# Altium PCB LDO_PCB.PcbDoc
Units mm, origin at the board's own origin, x right, y up, seen from the top; angles counter-clockwise.
Board outline 27 x 11.5 mm, 2 copper layers (Top Layer, Bottom Layer); 5 components, 3 nets, 17 pads, 4 vias.
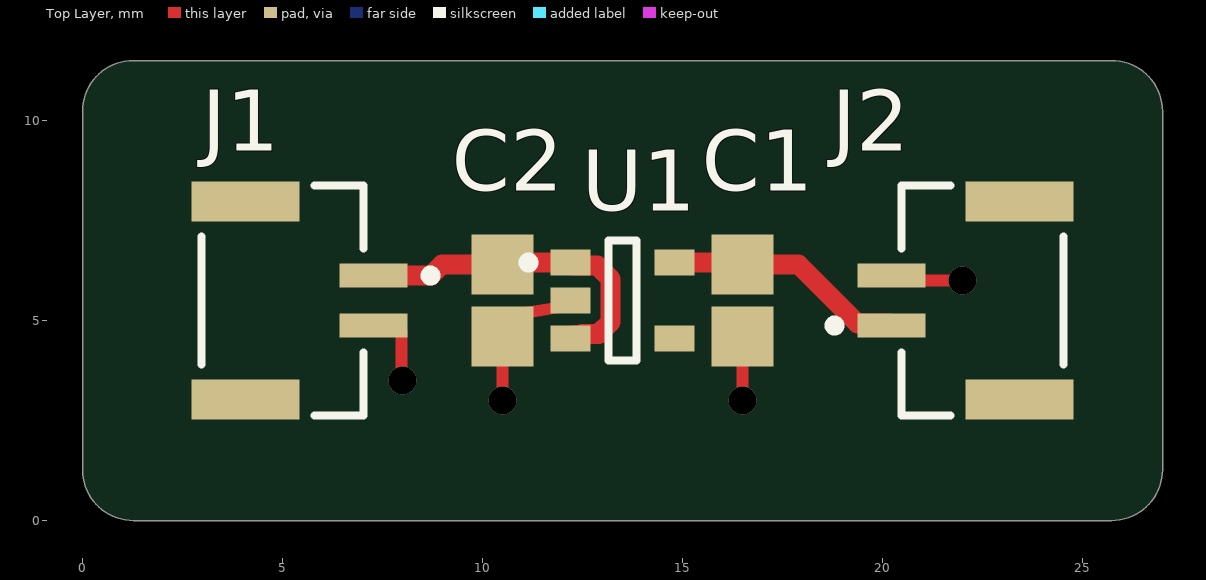
[diagram p0: Top Layer view]
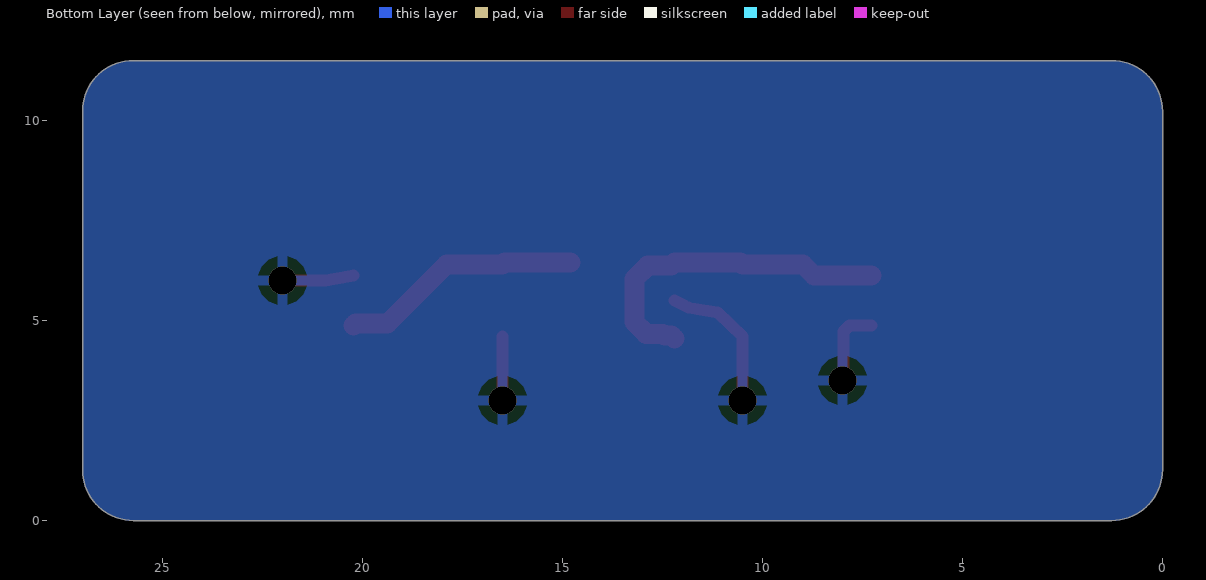
[diagram p1: Bottom Layer view, seen from below]
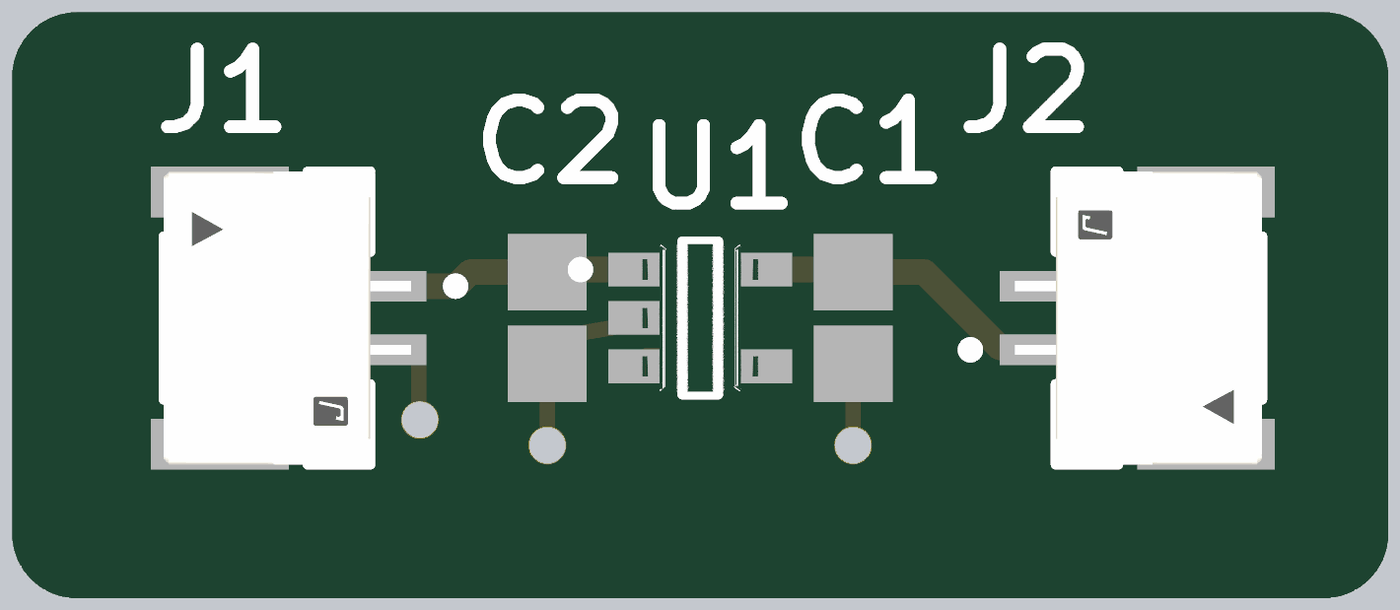
[diagram p2: 3D render of the assembled board from above, using the file's embedded part models]

## Layer stack, top to bottom
Top Solder: solder mask 0.0102, Solder Resist, Dk 3.5
Top Layer: signal copper 0.0356
Dielectric 1: dielectric 0.32, FR-4, Dk 4.8
Bottom Layer: signal copper 0.0356
Bottom Solder: solder mask 0.0102, Solder Resist, Dk 3.5

## Board outline
0,1.27 ccw(c1.27,1.27) 1.27,0 25.73,0 ccw(c25.73,1.27) 27,1.27 27,10.23 ccw(c25.73,10.23) 25.73,11.5 1.27,11.5 ccw(c1.27,10.23) 0,10.23

## Design rules (kind name [scope] priority, off if disabled: settings)
Clearance [All] p1: gap=0.254 ignorepadtopadclearanceinfootprint=FALSE
PolygonConnect [All] p1: connectstyle=Relief reliefconductorwidth=0.254 reliefentries=4 polygonreliefangle="90 Angle" airgapwidth=0.254
RoutingVias [All] p1: holewidth=0.711 width=1.27 viastyle="Through Hole" minholewidth=0.711 minwidth=1.27 maxholewidth=0.711 maxwidth=1.27
SolderMaskExpansion [All] p1: expansion=0 istentingtop=FALSE
SupplyNets "Schematic Supply Nets_2" [InNet('+3V3')] p1: voltage=0.000
SupplyNets "Schematic Supply Nets_1" [InNet('+5V')] p2: voltage=0.000
SupplyNets "Schematic Supply Nets" [InNet('GND')] p3: voltage=0.000
Width [All] p1: maxlimit=0.5 minlimit=0.254 preferedwidth=0.3
30 further rules are at their usual default settings.

## Components (designator, comment, footprint, x,y, rotation, side; value= is the part's Value field where it differs from the comment)
C1 "1 uF" CAPC2013X145X50ML20T25 16.5,5.5 r90 top
C2 "1 uF" CAPC2013X145X50ML20T25 10.5,5.5 r90 top
J1 "SM02B-GHS-TB(LF)(SN)" FP-SM02B-GHS-TB_LF_SN-MFG 5,5.5 r270 top
J2 "SM02B-GHS-TB(LF)(SN)" FP-SM02B-GHS-TB_LF_SN-MFG 22.5,5.5 r90 top
U1 "MIC5317-1.8YM5-TR" FP-SOT23-5LD-PL-1-MFG 13.5,5.5 r0 top

## Footprints (in the part's own frame and the unit in brackets; to place one, negate y for a bottom-side part, rotate by r counter-clockwise, add the part's x,y. Pads: shape width x height; smd on the part's side, far side on the other; paste and mask are expansions set on the pad)
CAPC2013X145X50ML20T25 [mm] "Chip Capacitor, 2-Leads, Body 2.00x1.25mm, IPC Low Density"
  rect 1.5x1.55 smd: 1(-0.9,0) 2(0.9,0)
  body extent -1.1,-0.72 1.1,0.72, height 1.45
FP-SM02B-GHS-TB_LF_SN-MFG [mm]
  rect 0.6x1.7 smd paste+0 mask+0: 1(-0.625,2.275) 2(0.625,2.275)
  rect 1x2.7 smd paste+0 mask+0: 3(-2.475,-0.925) 4(2.475,-0.925)
  silkscreen extent -2.88,-2.02 2.88,3.83, body extent -3.08,-2.37 3.08,3.22, height 0.25
FP-SOT23-5LD-PL-1-MFG [mm]
  rect 1x0.66 smd paste+0 mask+0: 1(-1.3,0.95) 2(-1.3,0) 3(-1.3,-0.95) 4(1.3,-0.95) 5(1.3,0.95)
  silkscreen extent -2.47,-1.5 0.35,1.5, body extent -1.9,-1.6 1.9,1.6, height 0.25

## Part data
C1 C2: library part CMP-2007-01253-1, Manufacturer=Kemet, Part Number=C0805C105K8NACTU
J1 J2: library part CMP-2000-07076-2, "CONN HEADER SMD R/A 2POS 1.25MM", Color=Natural, Current Rating=1A, Package Quantity=2500, Voltage Rating=50V, Connector Type="Outer Shroud Contact", Contact Material=Bronze, Contact Plating=Tin, Contact Type="Male Pin", Fastening Type=Latch, Housing Color=Natural, Housing Material=Nylon, Lead Free="Lead Free", Mount="Surface Mount", Number of Contacts=2, Number of Positions=2, Number of Rows=1, Orientation="Right Angle", Packaging="Tape and Reel", Pitch=0.049inch, Series=GH, Termination=Solder
U1: library part CMP-00252-66802792-1, "MIC5317-1.8YM5-TR LDO Regulator Pos 1.8V 0.15A 5-Pin SOT-23 T/R", Case/Package=SOT-23-5, Dropout Voltage=155mV, Max Input Voltage=6V, Max Operating Temperature=125°C, Min Current Limit=200mA, Min Input Voltage=2.5V, Min Operating Temperature=-40°C, Output Current=150mA, Output Voltage=1.8V, Power Supply Rejection Ratio (PSRR)=70dB, Lifecycle Status=Production, Mount="Surface Mount", NexarPartId=66802792, Number of Outputs=1, Number of Regulators=1, RoHS=Compliant, Schedule B="8542390000, 8542390000"

## Via types
v1: diameter 0.711, hole 0.711, Top Layer to Bottom Layer, 4 vias

## Nets (pads, with @x,y where several pads share a name; then routed paths per layer and width w, separated by ;. In a path a pad name is that pad's centre, name@x,y a point inside that pad or via, vN(x,y) a via of type N, cw(c..) or ccw(c..) an arc to the next point about the centre after c; other vN are vias at no path point)
+3V3: C1.2 J2.1 U1.5 | length 6.1
  Top Layer w0.5: U1.5 16.45,6.45 C1.2 17.9,6.4 19.375,4.925 20.175,4.925 J2.1
+5V: C2.2 J1.1 U1.1 U1.3 | length 8.5
  Top Layer w0.5: J1.1 8.712,6.125 8.987,6.4 C2.2 10.55,6.45 U1.1 12.28,6.37 12.873,6.37 13.204,6.039 13.204,4.961 12.909,4.666 12.486,4.666 12.45,4.63 12.28,4.63 U1.3
GND: C1.1 C2.1 J1.2 J2.2 U1.2 | length 9
  Top Layer w0.3: J1.2 7.825,4.875 7.975,4.725 7.975,3.525 v1(8,3.5) ; v1(10.5,3) C2.1 11.125,5.2 11.85,5.32 U1.2 ; v1(16.5,3) C1.1 ; J2.2 20.925,6 v1(22,6)
pads on no net: J1.3 J1.4 J2.3 J2.4 U1.4

## Polygon pours and split planes (outlines as drawn)
GND on Bottom Layer "GND_L02_P000" (solid, pour order 0): 0,1.27 ccw(c1.27,1.27) 1.27,0 25.73,0 ccw(c25.73,1.27) 27,1.27 27,10.23 ccw(c25.73,10.23) 25.73,11.5 1.27,11.5 ccw(c1.27,10.23) 0,10.23

## Silkscreen, mask and mechanical layers (free items; w line width, h text height)
Mechanical 1:
  lines w0.254: 0,1.27 ccw(c1.27,1.27) 1.27,0 25.73,0 ccw(c25.73,1.27) 27,1.27 27,10.23 ccw(c25.73,10.23) 25.73,11.5 1.5,11.5 1.27,11.5 ccw(c1.27,10.23) 0,10.23 0,1.27